# Altium PCB PCB1.PcbDoc
Units mm, origin at the board's own origin, x right, y up, seen from the top; angles counter-clockwise.
Board outline 50 x 65 mm, 2 copper layers (Top Layer, Bottom Layer); 99 components, 82 nets, 335 pads, 16 vias.
Unrouted connection lines stored in the file: 218.
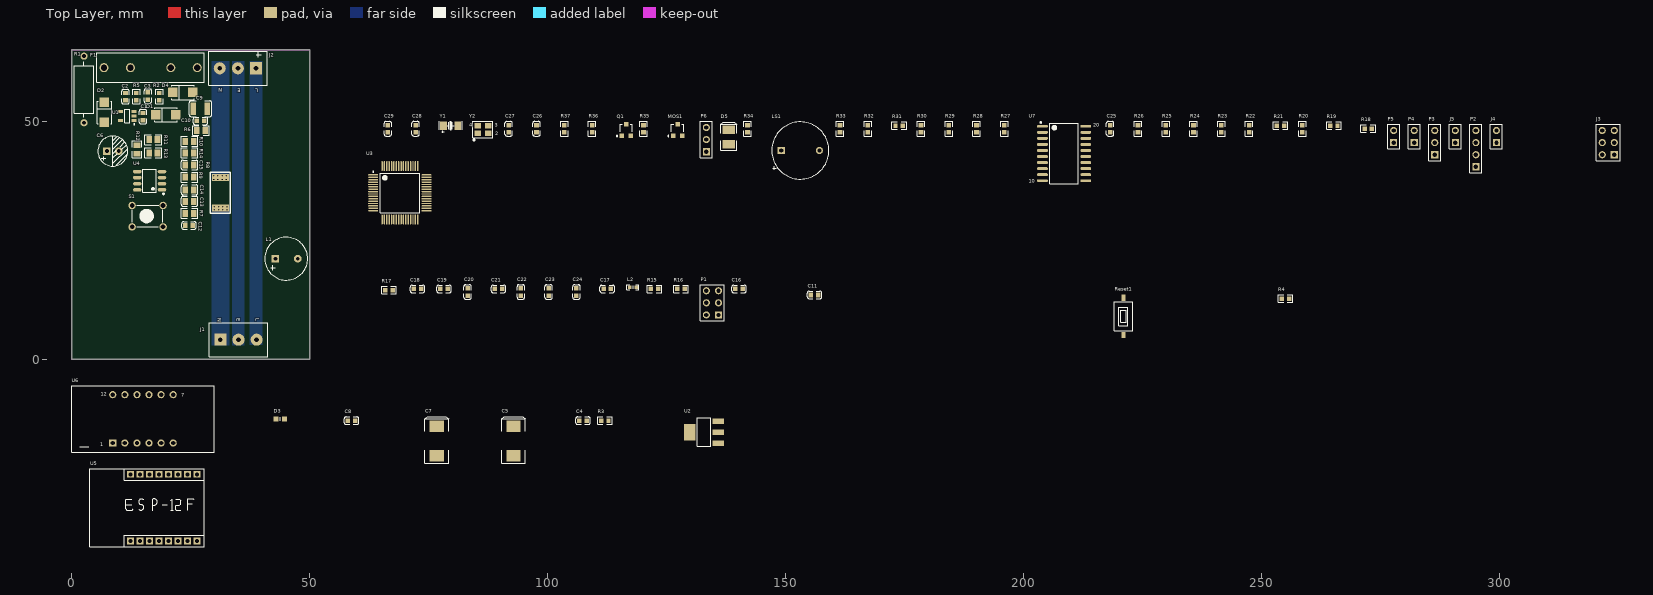
[diagram p0: Top Layer view]
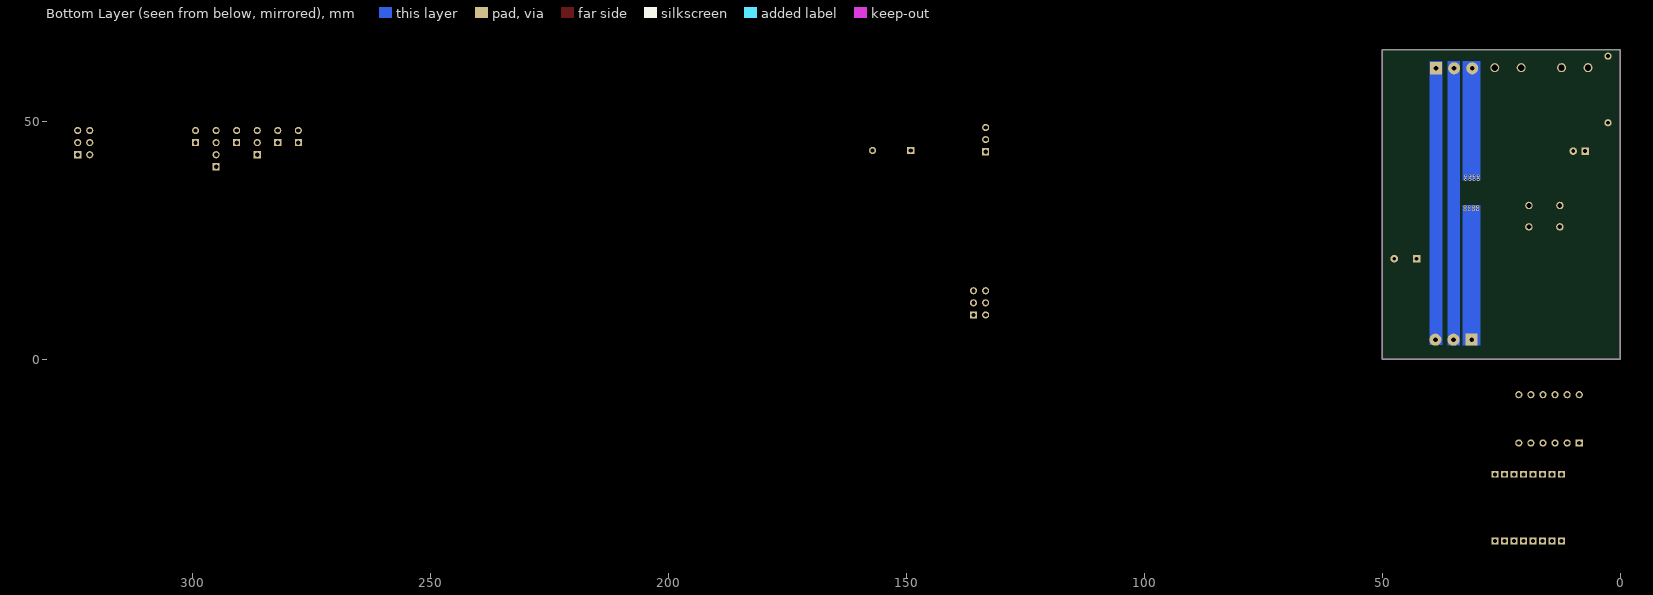
[diagram p1: Bottom Layer view, seen from below]

## Layer stack, top to bottom
Top Solder: solder mask 0.0102, Solder Resist, Dk 3.5
Top Layer: signal copper 0.0356
Dielectric 1: dielectric 0.32, FR-4, Dk 4.8
Bottom Layer: signal copper 0.0356
Bottom Solder: solder mask 0.0102, Solder Resist, Dk 3.5

## Board outline
0,0 50,0 50,65 0,65

## Design rules (kind name [scope] priority, off if disabled: settings)
Clearance [All] p1: gap=0.152 ignorepadtopadclearanceinfootprint=FALSE
PolygonConnect [All] p1: connectstyle=Relief reliefconductorwidth=0.254 reliefentries=4 polygonreliefangle="90 Angle" airgapwidth=0.254
RoutingVias [All] p1: holewidth=0.203 width=0.305 viastyle="Through Hole" minholewidth=0.152 minwidth=0.254 maxholewidth=0.762 maxwidth=1.27
SolderMaskExpansion [All] p1: expansion=0.102
Width [All] p1: maxlimit=1.27 minlimit=0.152 preferedwidth=0.203
30 further rules are at their usual default settings.

## Classes and differential pairs
component class Sheet2: C25 C26 C27 C28 C29 D5 J3 J4 J5 LS1 MOS1 P2 P3 P4 P5 P6 Q1 R18 R19 R20 R21 R22 R23 R24 R25 R26 R27 R28 R29 R30 R31 R32 R33 R34 R35 R36 R37 S1 U5 U6 U7 Y1 Y2
component class Sheet1: C1 C2 C3 C4 C5 C6 C7 C8 C9 C10 C11 C12 C13 C14 C15 C16 C17 C18 C19 C20 C21 C22 C23 C24 D1 D2 D3 D4 F1 J1 J2 L1 L2 P1 R1 R2 R3 R4 R5 R6 R7 R8 R9 R10 R11 R12 R13 R14 R15 R16 R17 Reset1 U1 U2 U3 U4

## Components (designator, comment, footprint, x,y, rotation, side; value= is the part's Value field where it differs from the comment)
C1 "2.2μF/10V" LC-0603_C(2.2UF/10V) 14.986,50.927 r270 top value="100nF (104) ±10% 50V"
C2 "470pF" LC-0603_C(普通电容) 11.303,55.118 r270 top value="100nF (104) ±10% 50V"
C3 "220nF" LC-0603_C(普通电容) 16.002,55.245 r90 top value="100nF (104) ±10% 50V"
C4 "0.1uF" LC-0603_C(普通电容) 107.442,-12.954 r0 top
C5 "22uF" 钽电容0603（25v） 92.202,-17.78 r90 top
C6 "3.3μF/400V" "直插电解电容 - duplicate" 8.656,43.688 r0 top
C7 "22uF" 钽电容0603（25v） 76.073,-17.78 r90 top
C8 "0.1uF" LC-0603_C(普通电容) 58.801,-12.954 r0 top
C9 "100μF" LC-1210_C大电容 27.051,52.578 r180 top value="100nF (104) ±10% 50V"
C10 "1μF" LC-0603_C(普通电容) 27.051,50.038 r180 top value="100nF (104) ±10% 50V"
C11 "0.1uF" LC-0603_C(普通电容) 156.083,13.462 r0 top
C12 "0.1μF" LC-0603_C(普通电容) 24.638,28.067 r0 top value="100nF (104) ±10% 50V"
C13 "33nF" LC-0805_C 24.765,33.147 r0 top value="100nF (104) ±10% 50V"
C14 "33nF" LC-0805_C 24.765,35.56 r180 top value="100nF (104) ±10% 50V"
C15 "33nF" LC-0805_C 24.765,40.767 r0 top value="100nF (104) ±10% 50V"
C16 "2.2uF" LC-0603_C(普通电容) 140.208,14.732 r0 top
C17 "0.1uF" LC-0603_C(普通电容) 112.522,14.732 r0 top
C18 "0.1uF" LC-0603_C(普通电容) 72.644,14.732 r0 top
C19 "0.1uF" LC-0603_C(普通电容) 78.232,14.732 r0 top
C20 "0.1uF" LC-0603_C(普通电容) 83.185,14.097 r90 top
C21 "0.1uF" LC-0603_C(普通电容) 89.662,14.732 r0 top
C22 "0.1uF" LC-0603_C(普通电容) 94.361,14.097 r90 top
C23 "4.7uF" LC-0603_C(普通电容) 100.203,14.097 r90 top
C24 "4.7uF" LC-0603_C(普通电容) 106.045,14.097 r90 top
C25 "0.1uF" LC-0603_C(普通电容) 218.186,48.387 r90 top
C26 "22pF" LC-0603_C(普通电容) 97.663,48.387 r90 top
C27 "6pF" LC-0603_C(普通电容) 91.821,48.387 r90 top
C28 "6pF" LC-0603_C(普通电容) 72.263,48.387 r90 top
C29 "22pF" LC-0603_C(普通电容) 66.421,48.387 r90 top
D1 "1N4007" 1N4007 19.812,50.927 r180 top
D2 "1N4007" 1N4007 6.477,51.816 r90 top
D3 "RED" LED0603 43.815,-12.573 r0 top
D4 "US1J(600V 1A)" US1J二极管LC-SMA(DO-214AC)_S1 23.368,56.007 r0 top
D5 "RED" 发光二极管(CASE-B_3528国星光电) 138.049,46.736 r90 top
F1 "20A 250V" FUSE_BASE 15.621,62.103 r0 top
J1 "用电接口" 3.81-3P(接线端子)输出 75.165,22.59 r270 top
J2 "供电接口" 3.81-3P(接线端子)输入 38.735,61.112 r180 top
J3 "固件升级接口" "Header2*3 2.54mm" 322.199,46.609 r90 top
J4 "烧录接口" "Header1*2 2.54mm" 299.466,47.879 r90 top
J5 "烧写接口" "Header1*2 2.54mm" 290.83,47.879 r90 top
L1 "1mH" L-10X14(电感) 45.085,21.082 r0 top
L2 "10uH" 电感(L0603) 118.745,14.859 r0 top
LS1 "Speaker" BEEP 152.4,44.069 r0 top
MOS1 "SI2302" MOS(SOP-23美微科) 537.337,175.133 r0 top
P1 "BOOT" "Header2*3 2.54mm" 133.985,12.954 r90 top
P2 "SWD" "Header1*4 2.54MM" 295.275,43.434 r90 top
P3 "串口2调试" "Header1*3 2.54mm" 286.131,45.72 r90 top
P4 "2Pin" "Header1*2 2.54mm" 282.194,47.879 r90 top
P5 "2Pin" "Header1*2 2.54mm" 277.876,47.879 r90 top
P6 "3P供电选择" "Header1*3 2.54mm" 133.096,46.355 r90 top
Q1 "S8050" SOP-23(NPN江苏长电) 116.713,48.768 r0 top
R1 "39Ω/1W" 炭膜电阻 2.921,57.912 r0 top
R2 "5.49KΩ" LC-0603_R(电阻) 18.415,55.118 r90 top
R3 "10k" LC-0603_R(电阻) 112.014,-12.954 r0 top value=1K
R4 "10K" LC-0603_R(电阻) 255.016,12.7 r0 top
R5 "4.99KΩ" LC-0603_R(电阻) 13.589,55.118 r270 top
R6 "1KΩ" LC-0805_R 27.178,48.006 r180 top
R7 "1KΩ,1%" LC-0805_R 24.765,30.607 r0 top
R8 "2mΩ/25A" R2512猛铜电阻 31.242,34.925 r90 top
R9 "1KΩ,1%" LC-0805_R 24.765,38.227 r0 top
R10 "470KΩ,1%" LC-0805_R 24.765,45.72 r0 top
R11 "470KΩ,1%" LC-0805_R 17.145,46.101 r0 top
R12 "470KΩ,1%" LC-0805_R 13.716,44.069 r90 top
R13 "470KΩ,1%" LC-0805_R 17.145,43.307 r180 top
R14 "1KΩ,1%" LC-0805_R 24.765,43.307 r0 top
R15 "10k" LC-0603_R(电阻) 122.428,14.732 r0 top value=10K
R16 "10k" LC-0603_R(电阻) 128.016,14.732 r0 top value=10K
R17 "10k" LC-0603_R(电阻) 66.675,14.478 r0 top value=0R
R18 "1K" LC-0603_R(电阻) 272.415,48.387 r0 top
R19 "10k" LC-0603_R(电阻) 265.176,49.022 r0 top value=10K
R20 "10k" LC-0603_R(电阻) 258.572,48.387 r90 top value=10K
R21 "10k" LC-0603_R(电阻) 254,49.022 r0 top value=10K
R22 "10k" LC-0603_R(电阻) 247.396,48.387 r90 top value=10K
R23 "10k" LC-0603_R(电阻) 241.554,48.387 r90 top value=10K
R24 "10k" LC-0603_R(电阻) 235.712,48.387 r90 top value=10K
R25 "10k" LC-0603_R(电阻) 229.87,48.387 r90 top value=10K
R26 "10k" LC-0603_R(电阻) 224.028,48.387 r90 top value=10K
R27 "10k" LC-0603_R(电阻) 195.961,48.387 r90 top value=100R
R28 "10k" LC-0603_R(电阻) 190.119,48.387 r90 top value=100R
R29 "10k" LC-0603_R(电阻) 184.277,48.387 r90 top value=100R
R30 "10k" LC-0603_R(电阻) 178.435,48.387 r90 top value=100R
R31 "10k" LC-0603_R(电阻) 173.863,49.022 r0 top value=100R
R32 "10k" LC-0603_R(电阻) 167.259,48.387 r90 top value=100R
R33 "10k" LC-0603_R(电阻) 161.417,48.387 r90 top value=100R
R34 "10k" LC-0603_R(电阻) 141.986,48.387 r90 top value=100R
R35 "10k" LC-0603_R(电阻) 120.142,48.387 r90 top value=1K
R36 "10k" LC-0603_R(电阻) 109.347,48.387 r90 top value=10K
R37 "10k" LC-0603_R(电阻) 103.505,48.387 r90 top value=10K
Reset1 "SW-PB" key 220.599,7.747 r90 top
S1 "SW-PB" key-4p 12.7,27.758 r90 top
U1 "MP150" MP150(LC-SOT-23-5) 11.684,51.054 r0 top
U2 "AMS1117-3.3V" SOT-223(ASM117-3.3) 132.842,-15.367 r0 top
U3 "STM32F411RET6" MCU-LQFP64 68.834,34.671 r0 top
U4 "HLW8032" (HLW8032)LC-SOP-8_150mil 16.383,37.465 r90 top
U5 "ESP8266" ESP8266 18.32,-25.527 r0 top
U6 "LED数码管(共阴)" "4位共阴数码管(0.36mm 30*14)" 15.494,-13.462 r0 top
U7 "74HC573" SOIC-20_300mil(74HC573) 207.772,46.736 r0 top
Y1 "32.768KHz" NX3215晶振 81.28,49.149 r0 top
Y2 "8M" SMD3225(8M晶振) 86.36,48.26 r0 top

## Footprints (in the part's own frame and the unit in brackets; to place one, negate y for a bottom-side part, rotate by r counter-clockwise, add the part's x,y. Pads: shape width x height; smd on the part's side, far side on the other; paste and mask are expansions set on the pad)
1N4007 [mm]
  rect 2x2 smd: 1(-2.092,-0.408) 2(2.108,-0.408)
  silkscreen extent -2.34,-1.91 2.36,1.09
3.81-3P(接线端子)输入 [mm]
  rect 2.54x2.54 hole 1: 1(0,0.025)
  round 2.54 hole 1: 2(3.81,0.025) 3(7.62,0.025)
  silkscreen extent -2.31,-3.58 9.91,3.63
3.81-3P(接线端子)输出 [mm]
  rect 2.54x2.54 hole 1: 1(18.526,-43.923)
  round 2.54 hole 1: 2(18.526,-40.113) 3(18.526,-36.303)
  silkscreen extent 14.92,-46.23 22.13,-34.02
"4位共阴数码管(0.36mm 30*14)" [mm]
  rect 1.5x1.5 hole 0.9: 1(-6.858,-4.191)
  round 1.5 hole 0.9: 2(-4.318,-4.191) 3(-1.778,-4.191) 4(0.762,-4.191) 5(3.302,-4.191) 6(5.842,-4.191) 7(5.842,5.969) 8(3.302,5.969) 9(0.762,5.969) 10(-1.778,5.969) 11(-4.318,5.969) 12(-6.858,5.969)
  silkscreen extent -15.49,-6.1 14.48,7.87
(HLW8032)LC-SOP-8_150mil [mm]
  oval 0.7x1.8 smd: 1(-1.905,-2.6) 2(-0.635,-2.6) 3(0.635,-2.6) 4(1.905,-2.6) 5(1.905,2.6) 6(0.635,2.6) 7(-0.635,2.6) 8(-1.905,2.6)
  silkscreen extent -2.9,-3.08 2.4,1.4, body extent -2.5,-3.1 2.5,3.1, height 1.75
BEEP [mm]
  rect 1.5x1.5 hole 0.9: 1(-3.302,-0.254)
  round 1.5 hole 0.9: 2(4.698,-0.254)
  silkscreen extent -5.3,-6.25 6.7,5.75
ESP8266 [mm]
  rect 1.4x1.4 hole 0.8: 1(-5.969,-12.7) 2(-3.969,-12.7) 3(-1.969,-12.7) 4(0.031,-12.7) 5(2.031,-12.7) 6(4.031,-12.7) 7(6.031,-12.7) 8(8.031,-12.7) 15(8.031,1.3) 16(6.031,1.3) 17(4.031,1.3) 18(2.031,1.3) 19(0.031,1.3) 20(-1.969,1.3) 21(-3.969,1.3) 22(-5.969,1.3)
  silkscreen extent -14.47,-13.9 9.53,2.5
FUSE_BASE [mm]
  round 1.9 hole 1.3: 1(-8.833,-0.889) 1(-3.273,-0.889) 2(5.207,-0.889) 2(10.767,-0.889)
  silkscreen extent -10.31,-3.99 12.22,2.21
"Header1*2 2.54mm" [mm]
  rect 1.5x1.5 hole 0.9: 1(-2.413,0.127)
  round 1.5 hole 0.9: 2(0.127,0.127)
  silkscreen extent -3.68,-1.14 1.4,1.4
"Header1*3 2.54mm" [mm]
  rect 1.5x1.5 hole 0.9: 1(-2.794,-0.254)
  round 1.5 hole 0.9: 2(-0.254,-0.254) 3(2.286,-0.254)
  silkscreen extent -4.06,-1.52 3.56,1.02
"Header1*4 2.54MM" [mm]
  rect 1.5x1.5 hole 0.9: 1(-3.048,0.254)
  round 1.5 hole 0.9: 2(-0.508,0.254) 3(2.032,0.254) 4(4.572,0.254)
  silkscreen extent -4.32,-1.02 5.84,1.52
"Header2*3 2.54mm" [mm]
  rect 1.5x1.5 hole 0.9: 1(-3.683,-1.905)
  round 1.5 hole 0.9: 2(-3.683,0.635) 3(-1.143,-1.905) 4(-1.143,0.635) 5(1.397,-1.905) 6(1.397,0.635)
  silkscreen extent -4.95,-3.18 2.67,1.91
key [mm]
  rect 1.3x0.8 smd: 1(-2.667,-0.381) 2(5.133,-0.381)
  silkscreen extent -1.82,-2.28 4.28,1.52
key-4p [mil]
  round 62 hole 38: 1(0,0) 1(177.17,0) 2(0,-255.91) 2(177.17,-255.91)
  silkscreen extent 0,-255 180,0
L-10X14(电感) [mm]
  rect 1.6x1.6 hole 0.8: 1(-2.286,0)
  round 1.6 hole 0.8: 2(2.413,0)
  silkscreen extent -4.5,-4.5 4.5,4.5
LC-0603_C(2.2UF/10V) [mm]
  rect 0.93x0.98 smd: 1(-0.77,0) 2(0.77,0)
  silkscreen extent -1.53,-0.79 1.54,0.79, body extent -0.8,-0.4 0.8,0.4, height 0.3
LC-0603_C(普通电容) [mm]
  rect 0.93x0.98 smd: 1(-0.77,0) 2(0.77,0)
  silkscreen extent -1.53,-0.79 1.54,0.79, body extent -0.8,-0.4 0.8,0.4, height 0.3
LC-0603_R(电阻) [mm]
  rect 0.93x0.98 smd: 1(-0.77,0) 2(0.77,0)
  silkscreen extent -1.53,-0.79 1.54,0.79, body extent -0.85,-0.4 0.85,0.4, height 0.56
LC-0805_C [mm]
  rect 1.16x1.47 smd: 1(-0.89,0) 2(0.89,0)
  silkscreen extent -1.77,-1.04 1.77,1.04, body extent -1,-0.62 1,0.63, height 0.77
LC-0805_R [mm]
  rect 1.16x1.47 smd: 1(-0.89,0) 2(0.89,0)
  silkscreen extent -1.77,-1.04 1.77,1.03, body extent -1,-0.62 1,0.63, height 0.49
LC-1210_C大电容 [mm]
  rect 1.16x2.72 smd: 1(-1.475,0) 2(1.475,0)
  silkscreen extent -2.36,-1.66 2.35,1.66, body extent -1.6,-1.25 1.6,1.25, height 1.3
LED0603 [mm]
  rect 1x1 smd: 1(-0.9,0) 2(0.9,0)
  silkscreen extent 0,-0.38 0,0.38
MCU-LQFP64 [mm]
  oval 2.1x0.3 smd: 1(-5.473,4.004) 2(-5.473,3.504) 3(-5.473,3.004) 4(-5.473,2.504) 5(-5.473,2.004) 6(-5.473,1.504) 7(-5.473,1.004) 8(-5.473,0.504) 9(-5.473,0.004) 10(-5.473,-0.496) 11(-5.473,-0.996) 12(-5.473,-1.496) 13(-5.473,-1.996) 14(-5.473,-2.496) 15(-5.473,-2.996) 16(-5.473,-3.496) 33(5.727,-3.496) 34(5.727,-2.996) 35(5.727,-2.496) 36(5.727,-1.996) 37(5.727,-1.496) 38(5.727,-0.996) 39(5.727,-0.496) 40(5.727,0.004) 41(5.727,0.504) 42(5.727,1.004) 43(5.727,1.504) 44(5.727,2.004) 45(5.727,2.504) 46(5.727,3.004) 47(5.727,3.504) 48(5.727,4.004)
  oval 0.3x2.1 smd: 17(-3.623,-5.346) 18(-3.123,-5.346) 19(-2.623,-5.346) 20(-2.123,-5.346) 21(-1.623,-5.346) 22(-1.123,-5.346) 23(-0.623,-5.346) 24(-0.123,-5.346) 25(0.377,-5.346) 26(0.877,-5.346) 27(1.377,-5.346) 28(1.877,-5.346) 29(2.377,-5.346) 30(2.877,-5.346) 31(3.377,-5.346) 32(3.877,-5.346) 49(3.877,5.854) 50(3.377,5.854) 51(2.877,5.854) 52(2.377,5.854) 53(1.877,5.854) 54(1.377,5.854) 55(0.877,5.854) 56(0.377,5.854) 57(-0.123,5.854) 58(-0.623,5.854) 59(-1.123,5.854) 60(-1.623,5.854) 61(-2.123,5.854) 62(-2.623,5.854) 63(-3.123,5.854) 64(-3.623,5.854)
  silkscreen extent -5.6,-3.9 4.28,4.83, body extent -4.87,-4.75 5.13,5.25, height 1.6
MOS(SOP-23美微科) [mm]
  rect 0.9x0.95 smd: 1(-410.972,-128.27) 2(-409.072,-128.27) 3(-410.022,-125.77)
  silkscreen extent -412.1,-128.39 -408.72,-125.77
MP150(LC-SOT-23-5) [mm]
  rect 1.1x0.6 smd: 1(1.4,-0.95) 2(1.4,0) 3(1.4,0.95) 4(-1.4,0.95) 5(-1.4,-0.95)
  silkscreen extent -0.5,-1.87 1.63,1.4
NX3215晶振 [mm]
  rect 1.4x1.8 smd: 1(-3.151,-0.127) 2(-0.151,-0.127)
  silkscreen extent -4.06,-1.65 0.76,0.76
R2512猛铜电阻 [mm]
  rect 1.5x3.6 smd: 1(-3.2,0) 2(3.2,0)
  silkscreen extent -4.3,-2.1 4.3,2.1
SMD3225(8M晶振) [mm]
  rect 1.4x1.15 smd: 1(-1.039,-0.842) 2(1.161,-0.842) 3(1.161,0.758) 4(-1.039,0.758)
  silkscreen extent -2.04,-2.39 2.16,1.66, body extent -1.54,-1.29 1.66,1.21, height 0.61
SOIC-20_300mil(74HC573) [mm]
  oval 2.3x0.6 smd: 1(-3.81,2.159) 2(-3.81,0.889) 3(-3.81,-0.381) 4(-3.81,-1.651) 5(-3.81,-2.921) 6(-3.81,-4.191) 7(-3.81,-5.461) 8(-3.81,-6.731) 9(-3.81,-8.001) 10(-3.81,-9.271) 11(5.29,-9.271) 12(5.29,-8.001) 13(5.29,-6.731) 14(5.29,-5.461) 15(5.29,-4.191) 16(5.29,-2.921) 17(5.29,-1.651) 18(5.29,-0.381) 19(5.29,0.889) 20(5.29,2.159)
  silkscreen extent -4.31,-9.93 3.74,3.14
SOP-23(NPN江苏长电) [mm]
  rect 0.9x0.95 smd: 1(-1.143,-1.905) 2(0.757,-1.905) 3(-0.193,0.595)
  silkscreen extent -2.27,-2.03 1.11,0.6
SOT-223(ASM117-3.3) [mm] "AMS1117"
  rect 2.4x1.2 smd: 1(3,-2.3) 2(3,0) 3(3,2.3)
  rect 2.4x3.5 smd: 4(-3,0)
  silkscreen extent -1.4,-3 1.4,3, body extent -3.49,-3.24 3.49,3.24, height 1.64
US1J二极管LC-SMA(DO-214AC)_S1 [mm]
  rect 2x2 smd: 1(2.1,0) 2(-2.1,0)
  silkscreen extent -2.35,-1.5 2.35,1.5
发光二极管(CASE-B_3528国星光电) [mm]
  rect 1.8x2.6 smd: 1(1.397,0) 2(-1.603,0)
  silkscreen extent -2.83,-1.65 3.06,1.65, body extent -1.95,-1.47 1.75,1.46, height 2.03
炭膜电阻 [mm]
  round 1.5 / inner oval 2x1.5 / far side round 1.5 hole 0.8: 1(-0.327,5.725)
  round 1.5 hole 0.8: 2(-0.327,-8.275)
  silkscreen extent -2.33,-7.08 1.67,4.52
电感(L0603) [mil]
  rect 30x30 smd: 1(-60,10) 2(-5.5,9.94)
  silkscreen extent -83,-10 17,30
"直插电解电容 - duplicate" [mm]
  rect 1.6x1.6 hole 0.8: 1(-1.25,0)
  round 1.6 hole 0.8: 2(1.25,0)
  silkscreen extent -3.15,-3.15 3.15,3.15
钽电容0603（25v） [mm]
  rect 2.4x3 smd: 1(3.7,-0.635) 2(-2.54,-0.635)
  silkscreen extent -4.07,-3.13 5.68,1.87, body extent -3.12,-2.86 4.28,1.59, height 3.01

## Part data
C1 C2 C3 C4 C8 C9 C10 C12 C13 C14 C15 C16 C17 C18 C19 C20 C21 C22 C23 C24: library part CAP, "贴片电容"
  C1: 名称=贴片电容, 封装=0603, 立创商城编号=C43922, 规格="2.2uF(2252.2uF(225) ±10% 16V 编带"
  C2 C3: 立创商城编号=常用
  C4 C17 C18 C19 C20 C21 C22: ֵ=0.1UF, 名称=贴片电容, 封装=0402, 规格="±10% 25V"
  C8: ֵ=0.1UF, 名称=贴片电容, 封装=0603, 规格="±10% 25V"
  C9 C12: 立创商城编号=C49066
  C10: 立创商城编号=C14664
  C13 C14 C15: 立创商城编号=C86036
  C16: ֵ=2.2UF, 名称=贴片电容, 封装=0603, 规格="±10% 25V"
  C23 C24: ֵ=1UF, 名称=贴片电容, 封装=0402, 规格="±10% 25V"
C5: library part "Cap Pol2", "钽电容", ֵ=22UF, 名称=钽电容(基美), 封装=CASE-D_7343, 立创商城编号=C122303, 规格="±10% 25V 编带"
C6: library part "Cap Pol1", "直插电解电容", 名称=电解电容, 立创商城编号=C47905, 规格="3.3uF 400V 袋装 6.3*12"
C7: library part "Cap Pol2", "钽电容、", ֵ=22uf, 名称=钽电容(基美), 封装=CASE-D_7343, 立创商城编号=C122249, 规格="±10% 25V 编带"
C11 C25 C29: library part "Cap Semi", "贴片电容", LatestRevisionDate=29-May-2009, LatestRevisionNote="IPC-7351 Footprint Added.", PackageDescription="Chip Capacitor", PackageReference=C1206, Published=8-Jun-2000, Publisher="Altium Limited"
  C29: ֵ=12pF, 名称=电容
C26 C27 C28: library part "Cap Semi", "贴片电阻", LatestRevisionDate=29-May-2009, LatestRevisionNote="IPC-7351 Footprint Added.", PackageDescription="Chip Capacitor", PackageReference=C1206, Published=8-Jun-2000, Publisher="Altium Limited"
  C26: ֵ=12pF, 名称=电容
  C28: ֵ=6pF, 名称=电阻
D1 D2 D4: library part "Diode 1N5408", "贴片二极管"
  D1: 名称=1N4007(SK), 封装=SMA(DO-214AC)-S1, 立创商城编号=C126233, 规格="M7 编带"
  D2: 名称=贴片二极管（SK）, 封装=SMA(DO-214AC)-S1, 立创商城编号=常用, 规格="M7 编带"
  D4: ComponentLink1Description="Manufacturer Link", ComponentLink1URL=http://www.irf.com/, DatasheetDocument=Aug-1984, LatestRevisionDate=17-Jul-2002, LatestRevisionNote="Re-released for DXP Platform.", PackageReference=DO-201AD, Published=8-Jun-2000, Publisher="Altium Limited", 立创商城编号=C86560
D3: library part LED1, "发光二极管0603", 名称=LED灯, 封装=0603, 规格=RED
D5: library part LED2, "发光二极管", 名称=发光二极管, 封装=CASE-B_3528, 立创商城编号=C85318, 规格="红色 贴片LED (280-350mcd) 编带"
F1: library part "Fuse 1", "Fuse", 名称=保险丝夹/座, 立创商城编号=C3130（座）C13567(保险丝), 规格=20A，250V，黄铜镀锡(镀镍)
J1 J2: library part Port-3P, "直插接线端子", 立创商城编号=C36780
J3: library part Header2*3, "固件升级接口2.54mm"
J4: library part ESP烧录, "烧录接口2.54mm"
J5: library part "Header1*2 2.54mm", "烧写接口2.54mm"
L1: library part IND_8, "直插绕线电感", AtherosDescription="IND,SMT,SHIELDING CHOKE,10uH,7.3x7.3", ATHEROS KEY=078-100LM-000, CISPartType=Inductor\Ferrite, OriginalSymbolOrigin=(0,0), 立创商城编号=C72626
L2: library part Inductor, "Inductor", ֵ=4.7UH, 名称=电感, 封装=0603
LS1: "Loudspeaker", 名称=蜂鸣器, 封装=RB5-9
MOS1: library part MOS-N, "AP2306", 名称=MOS(场效应管)(美微科), 封装=SOT-23(SOT-23-3), 立创商城编号=C77977, 规格="SI2302-TP 编带"
P1: library part "Header 3X2", "Header, 3-Pin, 杜邦线2.54", LatestRevisionDate=17-Jul-2002, LatestRevisionNote="Re-released for DXP Platform.", Publisher="Altium Limited"
P2: library part JMP2, "杜邦线2.54"
P3 P6: library part SIP, "排针 2.54MM"
P4 P5: library part "Header 2", "Header, 2-Pin", 名称=单排排针, 封装=HDR1X2, 规格=2.54mmX0.55mm
Q1: "NPN", 名称=三极管(S8050)长苏长电, 封装=SOT-23(SOT-23-3), 立创商城编号=C105433, 规格="L档120-200 编带"
R1 R2 R5 R6 R7 R8 R9 R10 R11 R12 R13 R14: library part 电阻, "贴片电阻", 名称=电阻
  R1: 封装=39Ω/1W, 立创商城编号=C65614
  R2: 型号=1KΩ, 立创商城编号=C23069
  R5: 型号=1KΩ, 立创商城编号=C23046
  R6 R7 R9 R14: 型号=1KΩ, 立创商城编号=C17513
  R8: 型号=1KΩ
  R10 R11 R12 R13: 型号=1KΩ, 立创商城编号=C17709
R3 R15 R16 R17 R18 R19 R20 R21 R22 R23 R24 R25 R26 R27 R28 R29 R30 R31 R32 R33 R34 R35 R36 R37: library part Res2, "贴片电阻", LatestRevisionDate=17-Jul-2002, LatestRevisionNote="Re-released for DXP Platform.", PackageDescription="Axial Device, Thru-Hole; 2 Leads; 0.4 in Pin Spacing", PackageReference=AXIAL-0.4, Published=8-Jun-2000, Publisher="Altium Limited"
R4: library part RES, "贴片电阻"
Reset1 S1: "轻触开关 3*6*2.5mm 白头", LatestRevisionDate=17-Jul-2002, LatestRevisionNote="Re-released for DXP Platform.", PackageDescription="Switch; 2 Leads", PackageReference=SPST-2, Published=24-Mar-1999, Publisher="Altium Limited"
U1: "IC", 名称=MP150, 封装=SOT-23-5, 立创商城编号=C55199, 规格="MP150GJ-Z 编带"
U2: "稳压芯片转3V3", 名称=低压差线性稳压(LDO), 封装=SOT-223, 立创商城编号=C6186, 规格="AMS1117-3.3 编带"
U3: library part STM32F411, "MCU", 名称=STM32F411RET6, 封装=STM-LQFP64_M
U4: "电量计芯片"
U5: "ESP-12F", 立创商城编号=C82891
U6: library part 4位8段数码管, "共阴数码管", 名称=LED数码管(国产), 封装=直插, 立创商城编号=C10708, 规格="四位0.36英寸红色共阴数码管 袋装"
U7: "锁存器", 名称=74系列逻辑芯片(安世), 封装=SOIC-20_300mil, 立创商城编号=C5608, 规格="74HC573D,653 编带"
Y1: library part XTAL, "FC135 32.768K 12.5PF 20ppm", 名称=贴片无源晶振(NDK), 封装=SMD-3215_2P, 立创商城编号=C156244, 规格="32.768KHZ 6pF 编带"
Y2: library part XTAL, "25M 20PF 10PPM", 名称=贴片无源晶振(KDS), 封装=SMD-3225_4P, 立创商城编号=C57131, 规格="8MHz 12pF 20ppm 编带"

## Via types
v1: diameter 0.61, hole 0.305, Top Layer to Bottom Layer, 16 vias

## Nets (pads, with @x,y where several pads share a name; then routed paths per layer and width w, separated by ;. In a path a pad name is that pad's centre, name@x,y a point inside that pad or via, vN(x,y) a via of type N, cw(c..) or ccw(c..) an arc to the next point about the centre after c; other vN are vias at no path point)
3V3: C17.2 C18.2 C19.2 C20.1 C21.1 C22.1 L2.1
5V: C7.1 C8.2 C9.2 C10.2 C12.1 D1.1 L1.2 P4.1 R6.2 U2.3 U4.1
AC220V-L: F1.2 J1.3 J2.1 R10.2
AC220V-N: C4.1 C5.2 C6.2 C7.2 C8.1 C9.1 C10.1 C11.1 C12.2 C13.2 C14.1 C15.2 C16.1 C17.1 C18.1 C19.1 C20.2 C21.2 C22.2 C25.2 C26.2 C27.2 C28.2 C29.2 D3.2 D4.1 J2.3 J3.3 J5.2 MOS1.2 P1.5 P1.6 P2.1 P3.1 P4.2 P5.2 Q1.2 R6.1 R8.2 R9.2 R14.2 R17.2 R19.1 R20.1 R21.1 R22.1 R23.1 R24.1 R25.1 R26.1 R36.2 R37.2 Reset1.2 S1.1 U2.1 U3.18 U3.31 U3.47 U3.63 U4.8 U5.15 U5.16 U7.1 U7.10 Y2.2 Y2.4
  other v1: 29.845,37.719 30.734,37.719 31.623,37.719 32.512,37.719 29.845,38.481 30.734,38.481 31.623,38.481 32.512,38.481
AGND: C23.1 C24.1 R17.1 U3.12
BEEP(PB5): R35.2 U3.57
"BitSel1(PB13 )": U3.34 U6.12
"BitSel2(PB14 )": U3.35 U6.9
"BitSel3(PB15 )": U3.36 U6.8
"BitSel4(PB12 )": U3.33 U6.6
BOOT0: R15.2 U3.60
BOOT1: R16.1 U3.28
HLW_TXD(PA10): U3.43 U4.7
JR1: R26.2 U3.24 U7.2
JR2: R25.2 U3.25 U7.3
JR3: R24.2 U3.39 U7.4
JR4: R23.2 U3.40 U7.5
JR5: R22.2 U3.51 U7.6
JR6: R21.2 U3.52 U7.7
JR7: R20.2 U3.53 U7.8
JR8: R19.2 U3.2 U7.9
Latches(PA1): P6.1 U3.15
LE: P6.2 U7.11
LED_R(PA6): MOS1.1 R36.1 U3.22
NetC1_1: C1.1 C2.1 C3.1 D4.2 L1.1 R5.1 U1.3 U1.4
NetC1_2: C1.2 U1.1
NetC2_2: C2.2 R2.1 R5.2 U1.2
NetC3_2: C3.2 D1.2 R2.2
NetC6_1: C6.1 D2.2 U1.5
NetC13_1: C13.1 R7.1 U4.2
NetC14_2: C14.2 R9.1 U4.3
NetC15_1: C15.1 R13.1 R14.1 U4.4
NetC16_2: C16.2 U3.30
NetD2_1: D2.1 R1.2
NetD3_1: D3.1 R3.2
NetD5_2: D5.2 MOS1.3
NetF1_1: F1.1 R1.1
NetJ1_1: J1.1 R7.2 R8.1
  other v1: 29.972,31.369 30.861,31.369 31.75,31.369 32.639,31.369 29.972,32.004 30.861,32.004 31.75,32.004 32.639,32.004
NetJ1_2: J1.2 J2.2
NetJ3_1: J3.1 U5.22
NetJ3_2: J3.2 U5.21
NetJ5_1: J5.1 U5.18
NetLS1_2: LS1.2 Q1.3
NetP1_3: P1.3 R15.1
NetP1_4: P1.4 R16.2
NetQ1_1: Q1.1 R35.1 R37.1
NetR10_1: R10.1 R11.2
NetR11_1: R11.1 R12.2
NetR12_1: R12.1 R13.2
NetR27_1: R27.1 U6.11
NetR27_2: R27.2 U7.19
NetR28_1: R28.1 U6.7
NetR28_2: R28.2 U7.18
NetR29_1: R29.1 U6.4
NetR29_2: R29.2 U7.17
NetR30_1: R30.1 U6.2
NetR30_2: R30.2 U7.16
NetR31_1: R31.1 U6.1
NetR31_2: R31.2 U7.15
NetR32_1: R32.1 U6.10
NetR32_2: R32.2 U7.14
NetR33_1: R33.1 U6.5
NetR33_2: R33.2 U7.13
NetR34_1: R34.1 U6.3
NetR34_2: R34.2 U7.12
NRST: C11.2 R4.1 Reset1.1 U3.7
"OSC32 IN": C28.1 U3.3 Y1.1
"OSC32 OUT": C27.1 U3.4 Y1.2
"OSC IN": C26.1 U3.5 Y2.3
"OSC OUT": C29.1 U3.6 Y2.1
PA5(KEY0): C25.1 R18.1 S1.2 U3.21
SWCLK: P2.2 U3.49
SWDIO: P2.3 U3.46
USART2_RX(PA3): P3.2 U3.17
USART2_TX(PA2): P3.3 U3.16
VCC3.3: P2.4 R18.2
VCC3.3A: C23.2 C24.2 L2.2 U3.13
VCC3.3V: C4.2 C5.1 D5.1 J4.1 LS1.1 P1.1 P1.2 P5.1 P6.3 R3.1 R4.2 U2.2 U2.4 U3.1 U3.19 U3.32 U3.48 U3.64 U5.8 U7.20
WIFI_EN(PB6): J4.2 U3.58 U5.3
WIFI_RST(PB7): U3.59 U5.1
WIFI_USART6_RX(PC7): J3.4 U3.38
WIFI_USART6_TX(PC6): J3.5 U3.37
pads on no net: J3.6 U3.8 U3.9 U3.10 U3.11 U3.14 U3.20 U3.23 U3.26 U3.27 U3.29 U3.41 U3.42 U3.44 U3.45 U3.50 U3.54 U3.55 U3.56 U3.61 U3.62 U4.5 U4.6 U5.2 U5.4 U5.5 U5.6 U5.7 U5.17 U5.19 U5.20

## Keep-outs
Keep-Out Layer:
  the board outline again, w0.254

## Other copper
Bottom Layer:
  rectangle net NetJ1_1: 29.337,2.794 33.147,32.385
  rectangle net AC220V-N: 29.337,37.465 33.147,62.611
  rectangle net NetJ1_2: 33.655,2.794 36.322,62.611
  rectangle net AC220V-L: 37.338,2.921 40.132,62.611
  rectangle net NetJ1_1: 29.972,4.572 30.734,30.861
  rectangle net NetJ1_1: 31.623,4.572 32.385,30.861
  rectangle net AC220V-N: 29.972,37.846 30.734,61.087
  rectangle net AC220V-N: 31.496,37.846 32.258,61.087
  rectangle net NetJ1_2: 35.433,4.064 36.195,60.833
  rectangle net NetJ1_2: 34.036,4.445 34.798,60.833
  rectangle net AC220V-L: 37.719,4.191 38.481,60.96
  rectangle net AC220V-L: 39.116,4.191 39.878,60.96

## Text inside footprints (layer, text, board x,y; h text height)
J1: Top Overlay "L" at 38.716,8.62 h0.76 r270; Top Overlay "E" at 34.652,8.62 h0.76 r270; Top Overlay "N" at 30.715,8.62 h0.76 r270
J2: Top Overlay "L" at 39.243,56.794 h0.76 r180; Top Overlay "E" at 35.56,56.794 h0.76 r180; Top Overlay "N" at 31.623,56.921 h0.76 r180
U6: Top Overlay "7" at 22.987,-7.874 h0.76; Top Overlay "12" at 6.096,-7.747 h0.76; Top Overlay "1" at 5.969,-18.288 h0.76
U7: Top Overlay "10" at 201.041,37.084 h0.76; Top Overlay "20" at 214.63,48.768 h0.76
Y2: Top Overlay "4" at 83.566,48.768 h0.76; Top Overlay "3" at 88.9,48.768 h0.76; Top Overlay "2" at 89.027,46.99 h0.76